# Altium PCB PCB1.PcbDoc
Units mm, origin at the board's own origin, x right, y up, seen from the top; angles counter-clockwise.
Board outline 88.57 x 89.64 mm, 2 copper layers (Top Layer, Bottom Layer); 16 components, 24 nets, 94 pads, 0 vias.
Unrouted connection lines stored in the file: 5.
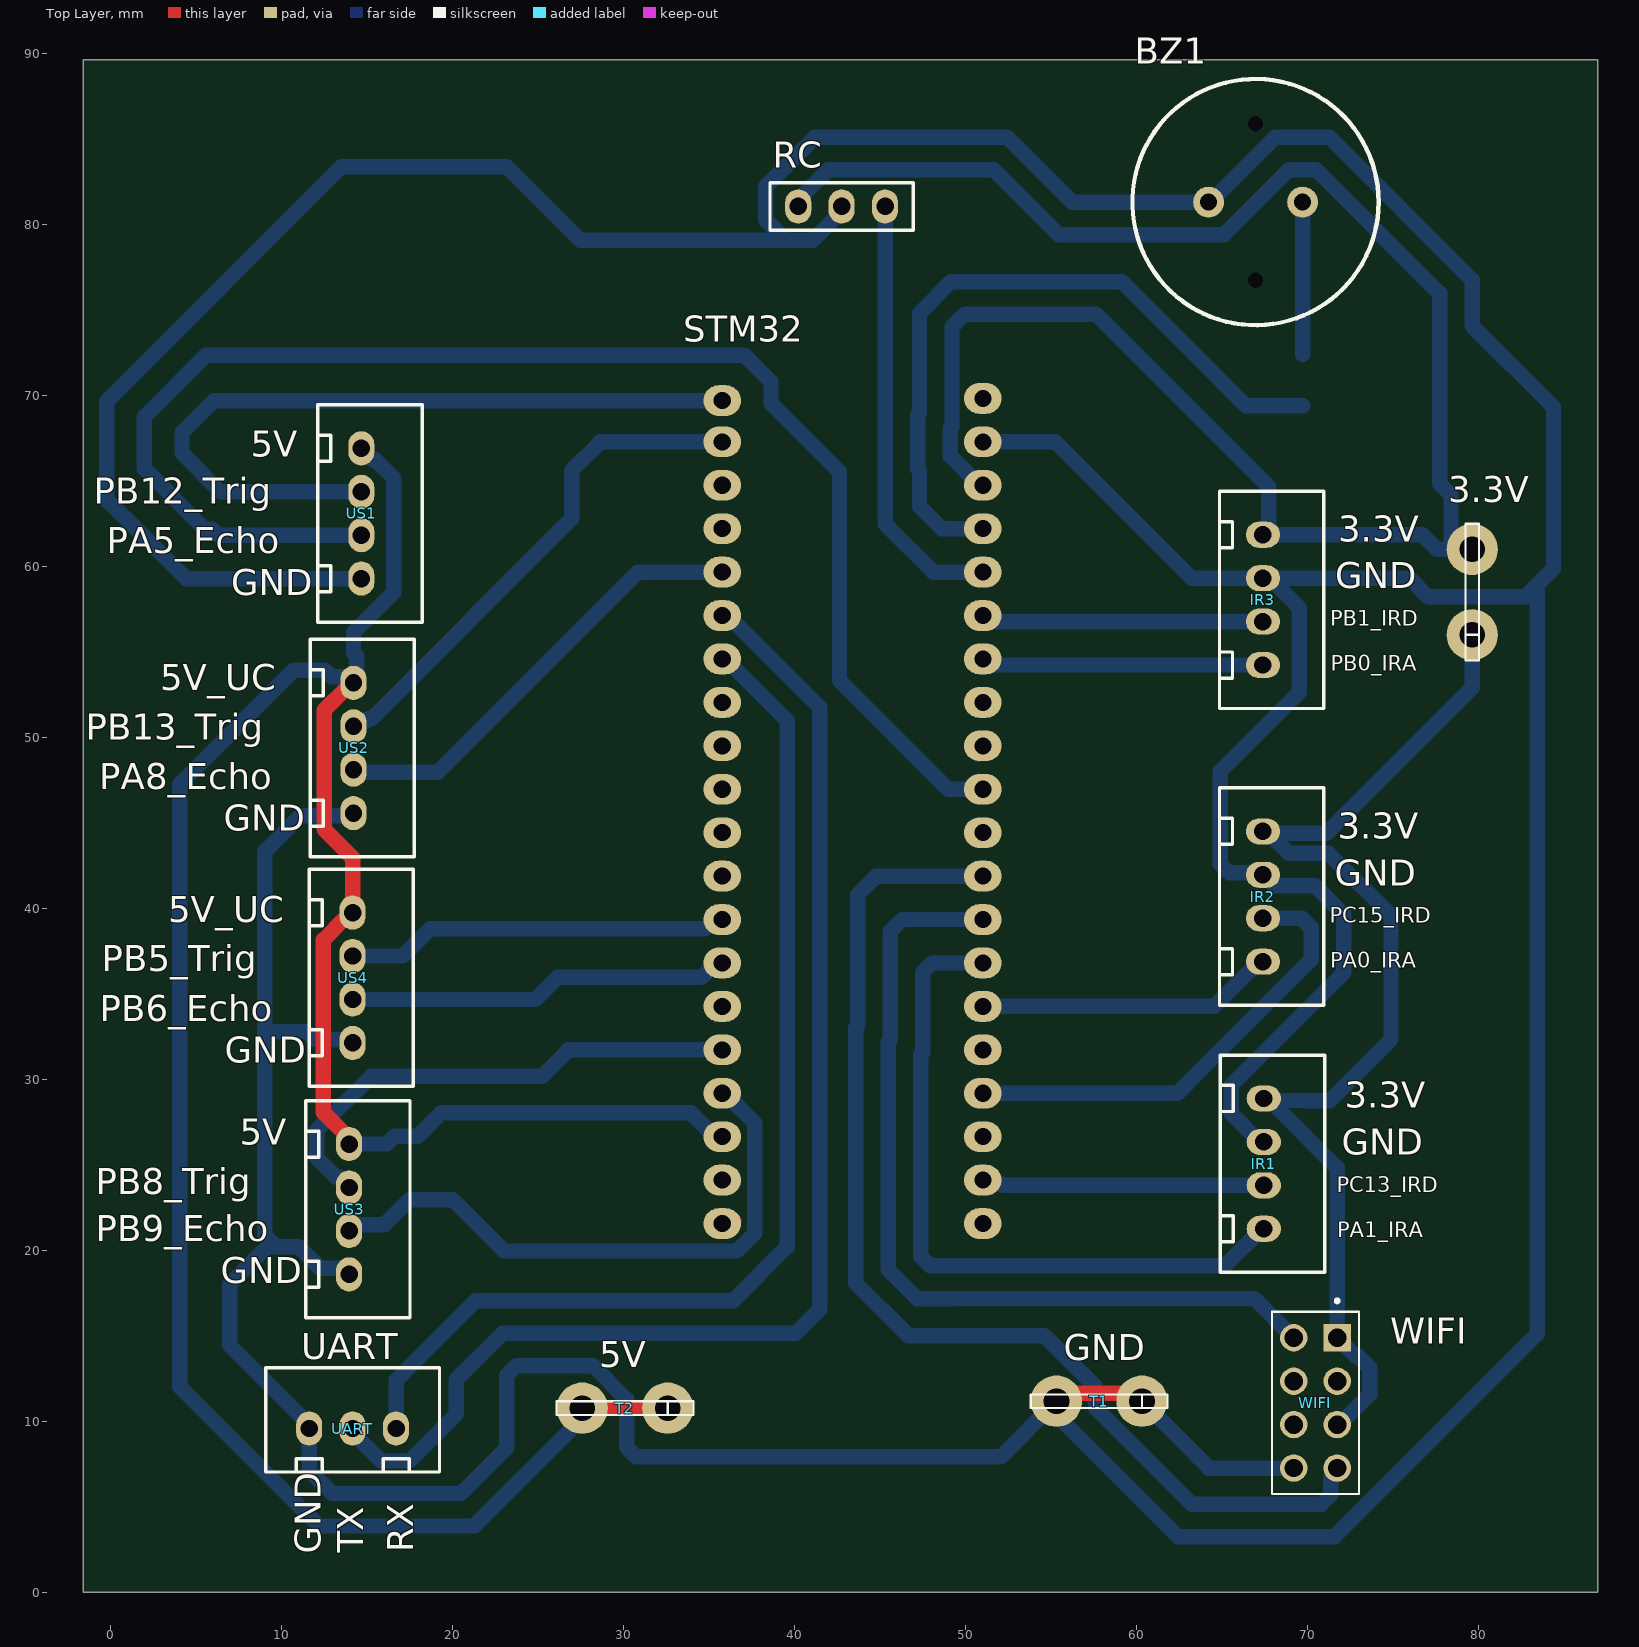
[diagram p0: Top Layer view]
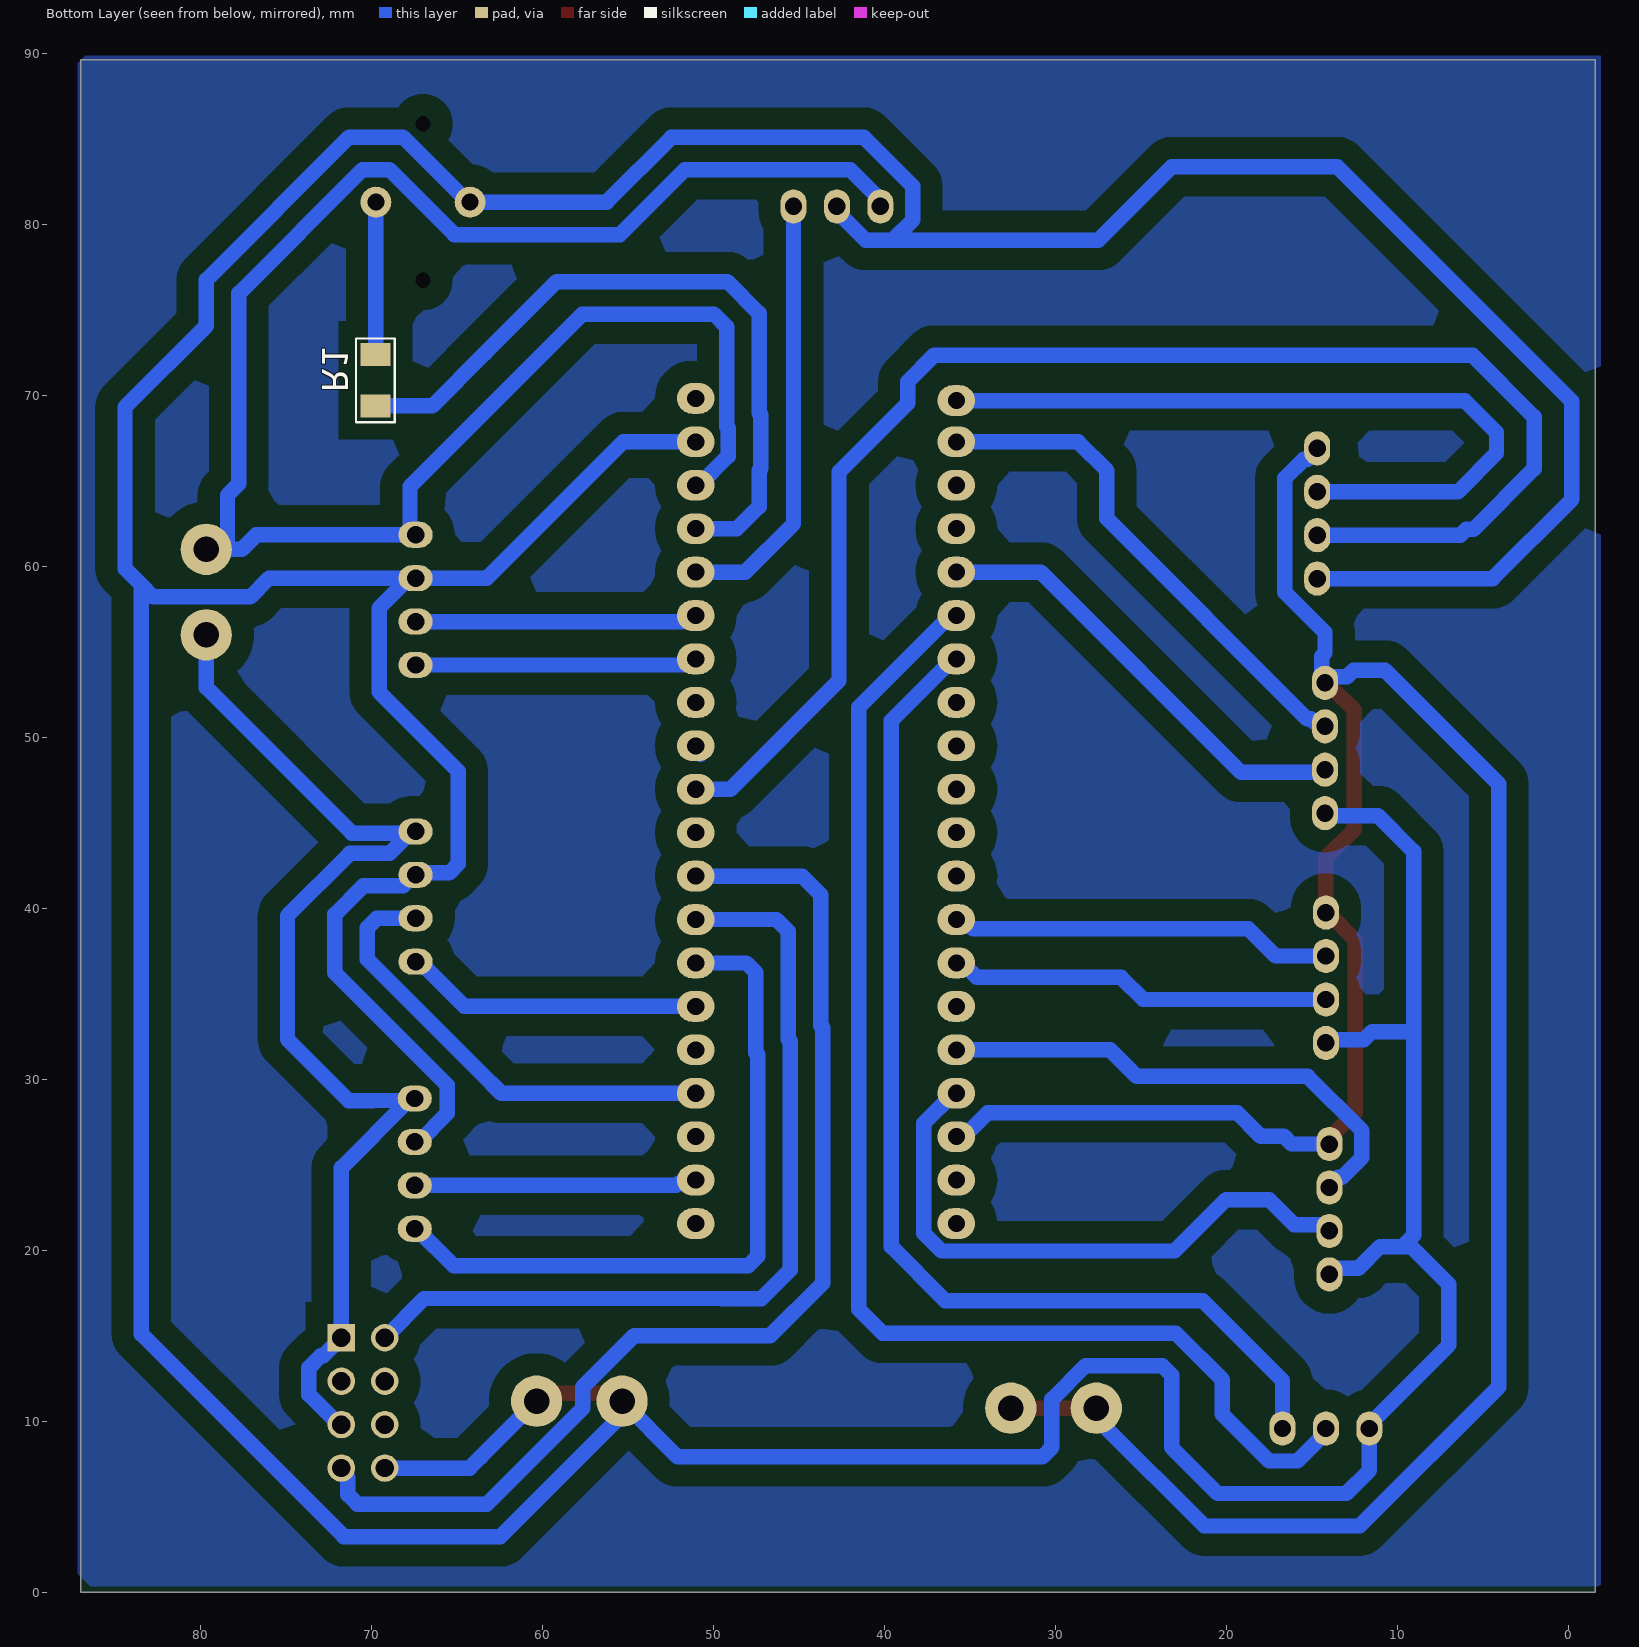
[diagram p1: Bottom Layer view, seen from below]
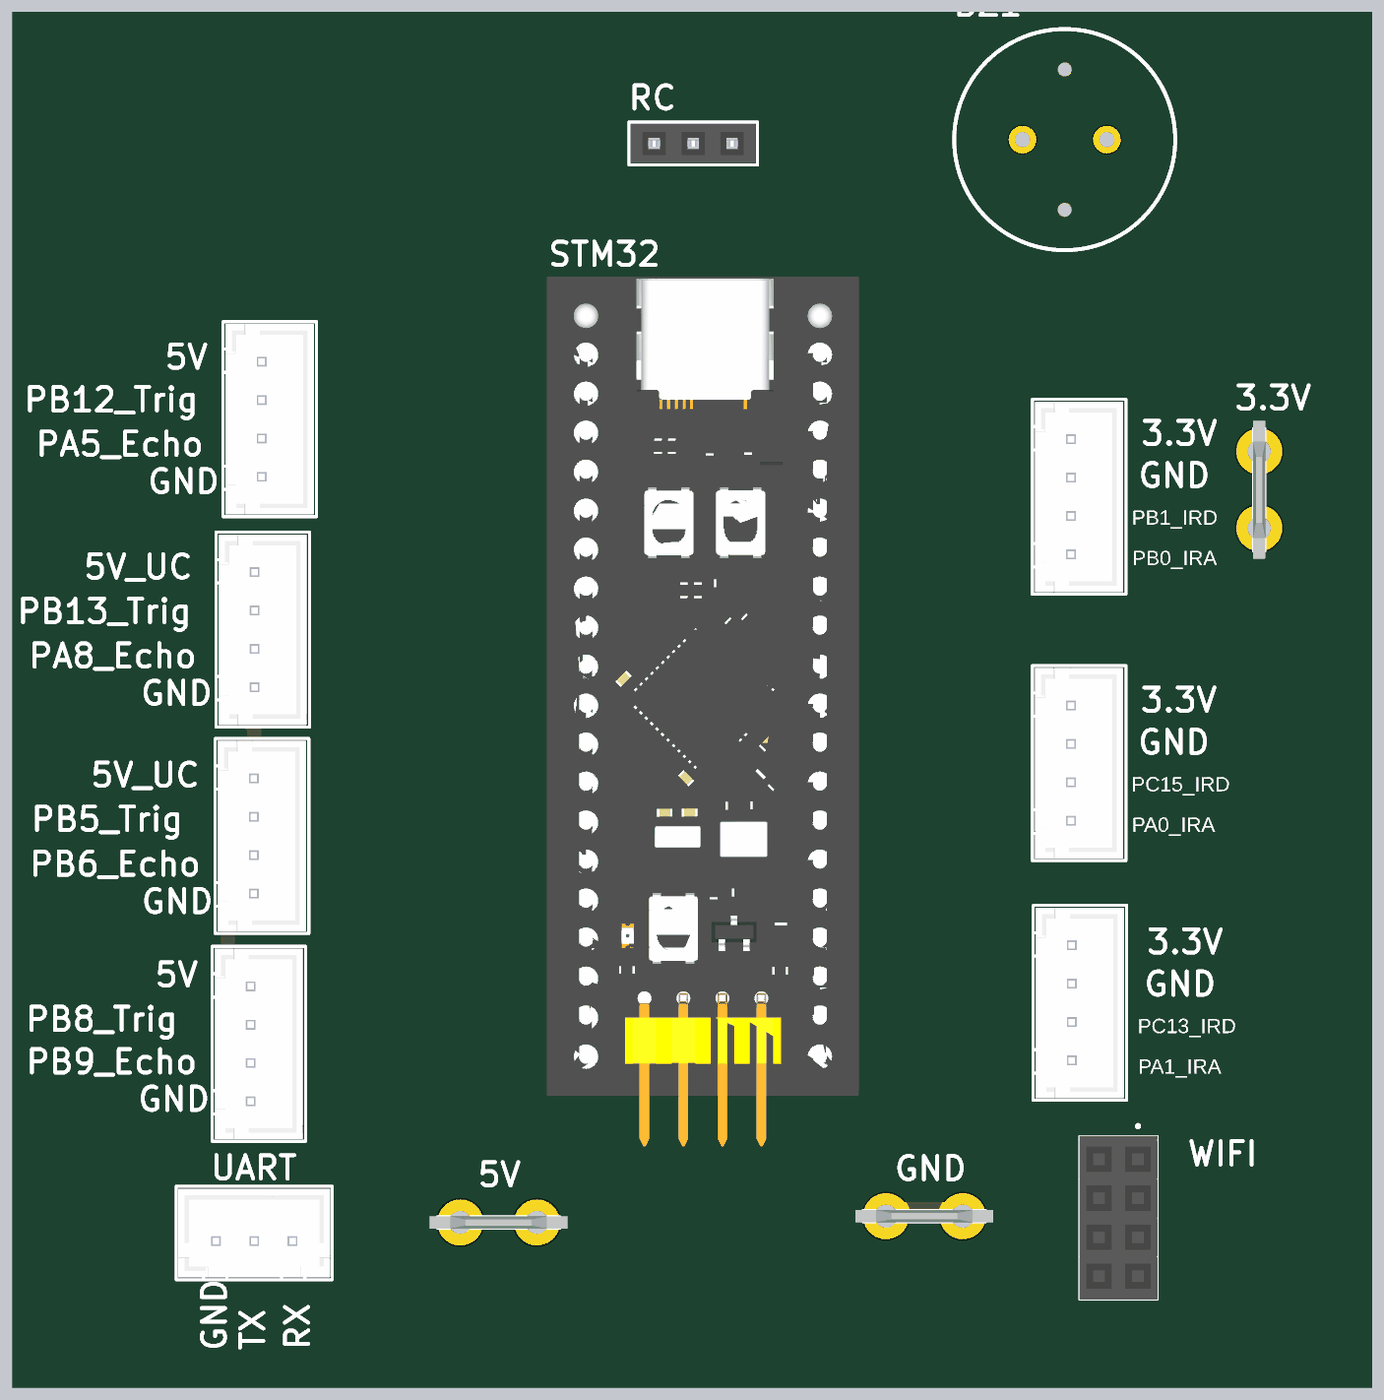
[diagram p2: 3D render of the assembled board from above, using the file's embedded part models]

## Layer stack, top to bottom
Top Solder: solder mask 0.0102, Solder Resist, Dk 3.5
Top Layer: signal copper 0.0356
Dielectric 1: dielectric 0.32, FR-4, Dk 4.8
Bottom Layer: signal copper 0.0356
Bottom Solder: solder mask 0.0102, Solder Resist, Dk 3.5

## Board outline
-1.575,0 87,0 87,89.635 -1.575,89.635

## Design rules (kind name [scope] priority, off if disabled: settings)
AssemblyTestPointUsage [All] p1: isadvanced=TRUE
AssemblyTestpoint [All] p1: isadvanced=TRUE testpointundercomponent=TRUE minsize=1.016 maxsize=2.54 preferedsize=1.524 minholesize=0 maxholesize=1.016 preferedholesize=0.813 testpointgrid=0.025 usegrid=TRUE gridtolerance=0 allowsidetop=TRUE allowsidebottom=TRUE
Clearance Clearance_2 [All] p1: isadvanced=TRUE gap=1.3 ignorepadtopadclearanceinfootprint=FALSE
Clearance PhysicalClearance_clearence [WithinRoom('clearence')] p2: gap=0.5 ignorepadtopadclearanceinfootprint=FALSE
Clearance Clearance_1_1 [OnMid vs OnMid] p3: gap=1 ignorepadtopadclearanceinfootprint=FALSE sourcerule=43 cellrowname=All cellrowtype=0 cellcolname=All cellcoltype=0 innerlayers=TRUE
Clearance Clearance_1_2 [(ExistsOnLayer('Top Layer') Or ExistsOnLayer('Bottom Layer')) vs (ExistsOnLayer('Top Layer') Or ExistsOnLayer('Bottom Layer'))] p4: gap=1 ignorepadtopadclearanceinfootprint=FALSE sourcerule=43 cellrowname=All cellrowtype=0 cellcolname=All cellcoltype=0 outerlayers=TRUE
Clearance Clearance_1 [All] p5: gap=1 ignorepadtopadclearanceinfootprint=FALSE ismatrix=TRUE
ComponentClearance [All] p1: isadvanced=TRUE gap=0.254 collisioncheckmode=3 verticalgap=0.254 showdistances=FALSE
FabricationTestPointUsage [All] p1: isadvanced=TRUE valid=0 allowmultiple=FALSE
FabricationTestpoint [All] p1: isadvanced=TRUE side=3 testpointundercomponent=TRUE minsize=1.016 maxsize=2.54 preferedsize=1.524 minholesize=0 maxholesize=1.016 preferedholesize=0.813 testpointgrid=0.025 allowsidetop=TRUE allowsidebottom=TRUE usegrid=TRUE gridtolerance=0
FanoutControl Fanout_BGA [IsBGA] p1: isadvanced=TRUE bgadir=Out bgaviamode=Centered fanoutstyle=Auto fanoutdirection=Alternating viagrid=0.025 // Fanout_BGA (Default Rule)
FanoutControl Fanout_LCC [IsLCC] p2: isadvanced=TRUE bgadir=Out bgaviamode=Centered fanoutstyle=Auto fanoutdirection=Alternating viagrid=0.025 // Fanout_LCC (Default Rule)
FanoutControl Fanout_SOIC [IsSOIC] p3: isadvanced=TRUE bgadir=Out bgaviamode=Centered fanoutstyle=Auto fanoutdirection=Alternating viagrid=0.025 // Fanout_SOIC (Default Rule)
FanoutControl Fanout_Small [(CompPinCount < 5)] p4: isadvanced=TRUE bgadir=Out bgaviamode=Centered fanoutstyle=Auto fanoutdirection=OutThenIn viagrid=0.025 // Fanout_Small (Default Rule)
FanoutControl Fanout_Default [All] p5: isadvanced=TRUE bgadir=Out bgaviamode=Centered fanoutstyle=Auto fanoutdirection=Alternating viagrid=0.025 // Fanout_Default (Default Rule)
Height [All] p1: isadvanced=TRUE minheight=0 maxheight=25.4 prefheight=12.7
HoleSize [All] p1: isadvanced=TRUE absolutevalues=TRUE maxlimit=2.54 minlimit=0.025 maxpercent=80.000 minpercent=20.000
HoleToHoleClearance [All] p1: isadvanced=TRUE gap=0.254 allowstackedmicrovias=TRUE
LayerPairs [All] p1: isadvanced=TRUE enforce=TRUE
MinimumSolderMaskSliver [All] p1: isadvanced=TRUE minsoldermaskwidth=0.254
NetAntennae [All] p1: isadvanced=TRUE netantennaetolerance=0
PasteMaskExpansion [All] p1: isadvanced=TRUE expansion=0
PlaneClearance [All] p1: isadvanced=TRUE clearance=0.508
PlaneConnect [All] p1: isadvanced=TRUE planeconnectstyle=Relief reliefexpansion=0.508 reliefentries=4 reliefconductorwidth=0.254 reliefairgap=0.254
PolygonConnect [All] p1: connectstyle=Relief reliefconductorwidth=0.254 reliefentries=4 polygonreliefangle="90 Angle" airgapwidth=0.254
RoutingCorners [All] p1: isadvanced=TRUE cornerstyle=45-Degree minsetback=2.54 maxsetback=2.54
RoutingPriority [All] p1: isadvanced=TRUE routingpriority=0
RoutingVias [All] p1: holewidth=0.711 width=1.27 viastyle="Through Hole" minholewidth=0.711 minwidth=1.27 maxholewidth=0.711 maxwidth=1.27
ShortCircuit [All] p1: isadvanced=TRUE allowed=FALSE
SilkToSilkClearance [All] p1: isadvanced=TRUE silktosilkclearance=0.254
SilkToSolderMaskClearance [IsPad] p1: isadvanced=TRUE minsilkscreentomaskgap=0.254 clearancetoexposedcopper=TRUE
SolderMaskExpansion [All] p1: isadvanced=TRUE expansion=0.102 istentingtop=FALSE
SupplyNets "Schematic Supply Nets_3" [InNet('+5V')] p1: isadvanced=TRUE voltage=0.000
SupplyNets "Schematic Supply Nets_2" [InNet('GND')] p2: isadvanced=TRUE voltage=0.000
SupplyNets "Schematic Supply Nets_1" [InNet('+3V3')] p3: isadvanced=TRUE voltage=0.000
SupplyNets "Schematic Supply Nets" [InNet('+5')] p4: isadvanced=TRUE voltage=0.000
UnRoutedNet [All] p1: isadvanced=TRUE
UnpouredPolygon [All] p1: isadvanced=TRUE
Width MaxMinWidth_1 [All] p1: isadvanced=TRUE maxlimit=1 minlimit=0.9 preferedwidth=0.95 minimp=50.000000 maximp=50.000000 favimp=50.000000
Width [All] p2 off: maxlimit=0.254 minlimit=0.254 preferedwidth=0.254
4 further rules are at their usual default settings.

## Components (designator, comment, footprint, x,y, rotation, side; value= is the part's Value field where it differs from the comment)
3.3V "Terminal pin 6.3mm" "Terminal pin 6.3mm" 79.654,58.496 r90 top (schematic designator T?)
BZ1 "PS1440P02BT" BUZZ_PS1440P02BT_TH 69.73,81.305 r180 top
IR1 "Line Follower2" DATA_PIN_HEADER_4_2.54m#1 67.462,25.07 r270 top
IR2 "Line Follower1" DATA_PIN_HEADER_4_2.54m#1 67.412,40.691 r270 top
IR3 "Line Follower3" DATA_PIN_HEADER_4_2.54m#1 67.412,58.039 r270 top
R1 "100R" RES_1206 69.748,70.891 r270 bottom
RC "IR" Female_Header_3 42.774,81.051 r0 top
STM32 "Stm32F401 small" STM32F401CCU6 43.028,47.092 r0 top (schematic designator STM1)
T1 "Terminal pin 6.3mm" "Terminal pin 6.3mm" 57.836,11.176 r180 top
T2 "Terminal pin 6.3mm" "Terminal pin 6.3mm" 30.099,10.77 r180 top
UART "DATA_PIN_HEADER_3_2.54m" DATA_PIN_HEADER_3_2.54m 14.173,9.576 r0 top
US1 "Ultrasonic1" DATA_PIN_HEADER_4_2.54m#2 14.681,63.094 r270 top
US2 "Ultrasonic2" DATA_PIN_HEADER_4_2.54m#2 14.224,49.378 r270 top
US3 "Ultrasonic3" DATA_PIN_HEADER_4_2.54m#2 13.97,22.403 r270 top
US4 "Ultrasonic4" DATA_PIN_HEADER_4_2.54m#2 14.173,35.941 r270 top
WIFI "WIFI" SULLINS_PPPC042LFBN-RC 70.485,11.074 r90 top

## Footprints (in the part's own frame and the unit in brackets; to place one, negate y for a bottom-side part, rotate by r counter-clockwise, add the part's x,y. Pads: shape width x height; smd on the part's side, far side on the other; paste and mask are expansions set on the pad)
BUZZ_PS1440P02BT_TH [mm] "AUDIO PIEZO TRANSDUCER 30V TH"
  round 1.8 hole 1 mask+0.076: 1(0,0) 2(5.5,0)
  round 0 hole 0.9: ""(2.75,4.572) ""(2.75,-4.572)
  silkscreen extent -4.45,-7.2 9.95,7.2, body extent -4.45,-7.2 9.95,7.2, height 9.55
DATA_PIN_HEADER_3_2.54m [mil]
  oval 60x78.74 hole 40: 1(-100,0) 2(0,0) 3(100,0)
  silkscreen extent -200,-100 200,140, body extent -195,-94 195,133, height 276
DATA_PIN_HEADER_4_2.54m#1 [mil]
  oval 60x78.74 hole 40: 1(-150,0) 2(-50,0) 3(50,0) 4(150,0)
  silkscreen extent -250,-100 250,140, body extent -244,-94 244,133, height 276
DATA_PIN_HEADER_4_2.54m#2 [mil]
  oval 78.74x60 hole 40: 1(-150,0) 2(-50,0) 3(50,0) 4(150,0)
  silkscreen extent -250,-100 250,140, body extent -244,-94 244,133, height 276
Female_Header_3 [mil]
  oval 60x78.74 hole 40: 1(-100,0) 2(0,0) 3(100,0)
  silkscreen extent -165,-55 165,55, body extent -160,-50 160,50, height 336
RES_1206 [mm] "CASE: 1206"
  rect 1.35x1.75 smd: 1(1.5,0) 2(-1.5,0)
  silkscreen extent -2.44,-1.15 2.46,1.11, body extent -1.55,-0.77 1.55,0.78, height 0.55
STM32F401CCU6 [mm]
  oval 2.2x1.8 hole 1: 3V3(-7.239,-25.527) 3V3(8.001,17.653) 5V(-7.239,-20.447) 5V(8.001,22.733) GND(-7.239,-22.987) GND(8.001,20.193) PA0(8.001,-12.827) PA1(8.001,-10.287) PA2(8.001,-7.747) PA3(8.001,-5.207) PA4(8.001,-2.667) PA5(8.001,-0.127) PA6(8.001,2.413) PA7(8.001,4.953) PA8(-7.239,12.573) PA9(-7.239,10.033) PA10(-7.239,7.493) PA11(-7.239,4.953) PA12(-7.239,2.413) PA15(-7.239,-0.127) PB0(8.001,7.493) PB1(8.001,10.033) PB2(8.001,12.573) PB3(-7.239,-2.667) PB4(-7.239,-5.207) PB5(-7.239,-7.747) PB6(-7.239,-10.287) PB7(-7.239,-12.827) PB8(-7.239,-15.367) PB9(-7.239,-17.907) PB10(8.001,15.113) PB12(-7.239,22.606) PB13(-7.239,20.193) PB14(-7.239,17.653) PB15(-7.239,15.113) PC13(8.001,-22.987) PC14(8.001,-20.447) PC15(8.001,-17.907) RESET(8.001,-15.367) VBAT(8.001,-25.527)
  body extent -9.78,-31.37 10.54,25.27, height 13.16
SULLINS_PPPC042LFBN-RC [mm]
  rect 1.605x1.605 / inner round 1.605 / far side rect 1.605x1.605 hole 1.07: 1(3.81,-1.27)
  round 1.605 hole 1.07: 2(3.81,1.27) 3(1.27,-1.27) 4(1.27,1.27) 5(-1.27,-1.27) 6(-1.27,1.27) 7(-3.81,-1.27) 8(-3.81,1.27)
  silkscreen extent -5.33,-2.54 6.07,2.54, body extent -5.33,-2.54 5.33,2.54, height 8.51
"Terminal pin 6.3mm" [mm]
  round 3 hole 1.5: 1(-2.5,0) 2(2.5,0)
  silkscreen extent -4,-0.4 4,0.4, body extent -4.5,-0.4 4.5,0.4, height 10

## Part data
BZ1: library part BUZZ_PS1440P02BT-30V-TH, "Buzzers Transducer, Externally Driven Piezo 3V  4kHz 75dB @ 3V, 10cm Through Hole PC Pins", Alternate Part Number-1=NA, Case/Package=TH, Manufacturer="TDK Corporation", Manufacturer Part Number=PS1440P02BT, Supplier Part Number-1=NA, Supplier-1="SP ROAD"
IR1 IR2 IR3 US1 US2 US3 US4: library part DATA_PIN_HEADER_4_2.54m
R1: library part RES_10R-0.25W-5%-1206, "10 Ohms ±5% 0.25W, 1/4W Chip Resistor 1206 (3216 Metric) Automotive AEC-Q200 Thick Film", Alternate Part Number-1=NA, Case/Package=1206, Manufacturer=Yageo, Manufacturer Part Number=RMCF1206JT10R0, Supplier Part Number-1=WR12X10R0FTL, Supplier-1=SIRICOM
RC: library part FEMALE_HEADER_3
WIFI: library part PPPC042LFBN-RC, "8 Position Total Dual Row 2.54 mm Pitch Straight Female Header", Package=None, Check_prices=https://www.snapeda.com/parts/PPPC042LFBNRC/Sullins/view-part/?ref=eda, MF="Sullins Connector Solutions", MP=PPPC042LFBNRC, SnapEDA_Link=https://www.snapeda.com/parts/PPPC042LFBNRC/Sullins/view-part/?ref=snap

## Nets (pads, with @x,y where several pads share a name; then routed paths per layer and width w, separated by ;. In a path a pad name is that pad's centre, name@x,y a point inside that pad or via, vN(x,y) a via of type N, cw(c..) or ccw(c..) an arc to the next point about the centre after c; other vN are vias at no path point)
+3V3: 3.3V.1 3.3V.2 IR1.1 IR2.1 IR3.1 RC.1 STM32.3V3 WIFI.1 WIFI.5 | length 176.6
  Top Layer w0.9: STM32.3V3@35.789,21.565 35.961,21.737 STM32.3V3@36.455,21.737
  Bottom Layer w0.9: RC.1@40.31,80.975 RC.1 40.234,81.436 41.987,83.189 51.673,83.189 55.457,79.405 65.143,79.405 68.943,83.205 70.517,83.205 77.749,75.973 77.749,64.834 78.414,64.169 78.414,61.536 78.547,61.536 78.816,61.266 3.3V.2@78.816,60.996 ; STM32.3V3@51.029,64.745 50.829,64.745 49.129,66.445 49.129,68.072 49.225,68.168 49.225,74.015 49.962,74.752 57.658,74.752 67.742,64.668 67.742,62.137 IR3.1@67.454,61.849 ; IR2.1 67.65,44.501 IR2.1@67.751,44.399 ; IR3.1 IR3.1@67.454,61.849 ; IR1.1 67.7,28.88 IR1.1@67.82,28.76 ; 71.62,12.479 71.755,12.344 ; WIFI.5 71.902,9.804 73.655,11.557 73.655,13.131 72.949,13.837 72.802,13.837 WIFI.1 71.755,24.825 IR1.1@67.82,28.76 ; 3.3V.1 79.654,52.908 71.145,44.399 IR2.1@67.751,44.399 ; 3.3V.2 3.3V.2@78.816,60.996 ; IR3.1@67.454,61.849 76.728,61.849 77.581,60.996 3.3V.2@78.816,60.996 ; IR2.1@67.751,44.399 68.93,43.221 71.253,43.221 74.905,39.57 74.905,32.334 71.323,28.753 69.896,28.753 69.889,28.76 IR1.1@67.82,28.76
+5: STM32.5V T2.1 T2.2 US1.1 US2.1 US3.1 US4.1 | length 152.1
  Top Layer w0.9: US3.1 13.97,26.561 12.461,28.07 12.461,38.158 13.697,39.394 13.885,39.394 14.173,39.682 14.173,42.959 12.512,44.62 12.512,51.595 13.747,52.83 13.936,52.83 14.224,53.118 US2.1 ; T2.2 T2.1 ; STM32.5V@35.789,26.645 STM32.5V@35.989,26.645 ; STM32.5V@50.829,69.825 STM32.5V@51.029,69.825
  Bottom Layer w0.9: US3.1 13.977,26.22 16.182,26.22 16.632,26.67 17.984,26.67 19.36,28.046 33.944,28.046 35.345,26.645 STM32.5V@35.789,26.645 ; US2.1 14.224,53.257 13.936,53.545 12.936,53.545 12.557,53.924 10.719,53.924 4.064,47.269 4.064,12.008 12.196,3.876 21.286,3.876 27.197,9.787 27.197,10.368 T2.2 ; US2.1@14.409,53.924 14.409,54.75 14.224,54.935 14.224,56.139 16.581,58.497 16.581,65.151 15.468,66.264 15.252,66.264 14.681,66.834 US1.1
Buzzer: R1.1 STM32.PB10 | length 41.8
  Bottom Layer w0.9: STM32.PB10 48.616,62.205 47.325,63.496 47.325,65.615 47.229,65.711 47.229,68.859 47.325,68.955 47.325,74.802 49.175,76.652 59.162,76.652 63.348,72.466 66.422,69.391 R1.1
GND: BZ1.2 IR1.2 IR2.2 IR3.2 RC.2 STM32.GND T1.1 T1.2 UART.1 US1.4 US2.4 US3.4 US4.4 WIFI.8 | length 436.4
  Top Layer w0.9: STM32.GND@35.789,24.105 STM32.GND@36.136,24.105 ; STM32.GND@50.976,67.285 STM32.GND@51.029,67.285 ; T1.2@55.336,11.633 T1.1@60.336,11.633
  Bottom Layer w0.9: 9.068,32.791 11.473,32.791 11.961,32.304 14.001,32.304 US4.4 ; US3.4 13.97,18.662 13.682,18.95 12.279,18.95 11.011,20.218 9.703,20.218 ; US2.4 14.072,45.415 11.125,45.415 9.042,43.332 9.042,20.879 9.703,20.218 ; US1.4 4.425,59.284 -0.208,63.917 -0.208,69.656 13.499,83.363 23.19,83.363 27.478,79.075 39.523,79.075 ; RC.2 42.774,80.752 41.097,79.075 39.523,79.075 ; STM32.GND@51.029,67.285 55.27,67.285 63.246,59.309 IR3.2 IR3.2@67.787,59.309 ; T1.1 63.607,7.904 64.247,7.264 WIFI.8 ; IR1.2 67.224,26.34 65.562,28.002 65.562,29.667 66.675,30.78 66.685,30.78 72.136,36.231 72.136,39.651 70.466,41.321 68.143,41.321 67.503,41.961 IR2.2 67.292,42.08 65.436,42.08 64.922,42.593 64.922,48.034 69.54,52.652 69.54,57.556 IR3.2@67.787,59.309 ; 83.45,56.171 83.45,56.603 ; 9.703,20.218 9.195,20.218 6.984,18.008 6.984,14.463 11.633,9.814 11.633,7.126 12.983,5.776 20.499,5.776 23.19,8.467 23.19,12.702 23.747,13.259 28.227,13.259 30.201,11.285 30.201,8.481 30.757,7.925 52.085,7.925 T1.2 55.738,10.774 55.738,9.97 62.452,3.256 71.605,3.256 83.45,15.101 83.45,56.603 ; 39.523,79.075 38.334,80.264 38.334,82.223 41.2,85.089 52.46,85.089 56.244,81.305 BZ1.2 64.356,81.305 68.156,85.105 71.304,85.105 79.649,76.76 79.649,74.073 84.407,69.315 84.407,59.866 83.45,58.908 ; IR3.2@67.787,59.309 75.985,59.309 77.078,58.217 82.758,58.217 83.45,58.908 ; 83.45,56.603 83.45,58.908
IR1_A0: IR2.4 STM32.PA0 | length 17.5
  Bottom Layer w0.9: STM32.PA0 64.557,34.265 67.174,36.881 IR2.4
IR1_D0: IR2.3 STM32.PC15 | length 27.4
  Bottom Layer w0.9: STM32.PC15 62.402,29.185 63.662,30.445 63.662,30.454 65.888,32.68 65.898,32.68 70.236,37.018 70.236,38.864 69.679,39.421 IR2.3
IR2_A0: IR1.4 STM32.PA1 | length 41.6
  Bottom Layer w0.9: STM32.PA1 48.065,36.805 47.508,36.248 47.508,31.548 47.396,31.436 47.396,19.657 47.953,19.101 65.187,19.101 67.346,21.26 IR1.4
IR2_D0: IR1.3 STM32.PC13 | length 16.6
  Bottom Layer w0.9: STM32.PC13 51.201,23.932 52.037,23.932 52.17,23.8 IR1.3
IR3_A0: IR3.4 STM32.PB0 | length 16.8
  Bottom Layer w0.9: STM32.PB0 51.472,54.585 51.828,54.229 IR3.4 IR3.4@67.64,54.229
IR3_D0: IR3.3 STM32.PB1 | length 16.8
  Bottom Layer w0.9: STM32.PB1 51.472,57.125 51.828,56.769 IR3.3 IR3.3@67.64,56.769
IR_OUT: RC.3 STM32.PB2 | length 25.5
  Bottom Layer w0.9: RC.3 45.314,62.484 48.133,59.665 STM32.PB2
NetBZ1_1: BZ1.1 R1.2 | length 8.9
  Bottom Layer w0.9: BZ1.1 69.739,81.296 69.739,72.401 R1.2
RX: STM32.PA10 UART.3 | length 65
  Bottom Layer w0.9: UART.3 16.713,12.395 21.377,17.059 36.438,17.059 39.589,20.209 39.589,50.985 35.989,54.585 STM32.PA10
TX: STM32.PA9 UART.2 | length 76.2
  Bottom Layer w0.9: UART.2 14.377,9.372 14.377,9.134 15.835,7.676 17.5,7.676 20.23,10.406 20.23,12.429 22.96,15.159 40.105,15.159 41.489,16.542 41.489,51.772 36.136,57.125 STM32.PA9
US1_ECHO: STM32.PA5 US1.3 | length 86.3
  Bottom Layer w0.9: US1.3 6.304,61.824 5.964,62.164 5.54,62.164 1.992,65.711 1.992,68.744 5.595,72.348 37.086,72.348 38.639,70.795 38.639,69.535 42.646,65.527 42.646,53.315 48.997,46.965 STM32.PA5
US1_TRIG: STM32.PB12 US1.2 | length 45
  Bottom Layer w0.9: US1.2 6.451,64.364 4.192,66.623 4.192,67.833 6.056,69.698 STM32.PB12
US2_ECHO: STM32.PA8 US2.3 | length 26.5
  Bottom Layer w0.9: US2.3 14.376,47.955 14.529,47.955 19.14,47.955 30.85,59.665 STM32.PA8
US2_TRIG: STM32.PB13 US2.2 | length 30.2
  Bottom Layer w0.9: US2.2 14.307,50.564 14.529,50.564 15.05,51.085 15.266,51.085 26.98,62.799 26.98,65.599 28.666,67.285 STM32.PB13
US3_ECHO: STM32.PB9 US3.3 | length 35.3
  Bottom Layer w0.9: US3.3 13.97,21.202 14.258,21.49 16.02,21.49 17.496,22.966 20.014,22.966 23.019,19.961 36.653,19.961 37.593,20.9 37.689,20.996 37.689,27.432 35.936,29.185 STM32.PB9
US3_TRIG: STM32.PB8 US3.2 | length 29.9
  Bottom Layer w0.9: US3.2 13.97,23.742 13.449,24.263 13.233,24.263 12.07,25.426 12.07,27 15.245,30.175 25.236,30.175 26.786,31.725 STM32.PB8
US4_ECHO: STM32.PB6 US4.3 | length 22.5
  Bottom Layer w0.9: US4.3 24.854,34.671 26.15,35.966 34.582,35.966 35.421,36.805 STM32.PB6
US4_TRIG: STM32.PB5 US4.2 | length 22.5
  Bottom Layer w0.9: US4.2 17.111,37.211 18.699,38.799 34.8,38.799 35.345,39.345 STM32.PB5
WIFI_RXD: STM32.PA2 WIFI.2 | length 50.9
  Bottom Layer w0.9: STM32.PA2 50.976,39.345 46.302,39.345 45.608,38.651 45.608,32.335 45.496,32.223 45.496,18.87 47.201,17.165 49.464,17.165 49.479,17.18 66.546,17.18 66.919,17.18 WIFI.2
WIFI_TXD: STM32.PA3 WIFI.7 | length 66.3
  Bottom Layer w0.9: STM32.PA3 44.806,41.885 43.708,40.787 43.708,33.122 43.596,33.01 43.596,18.083 46.678,15.002 54.218,15.002 54.627,15.002 57.638,11.991 57.638,10.757 63.239,5.156 70.818,5.156 71.374,5.713 71.374,6.693 71.755,7.074 WIFI.7
pads on no net: BZ1. STM32.PA4 STM32.PA6 STM32.PA7 STM32.PA11 STM32.PA12 STM32.PA15 STM32.PB3 STM32.PB4 STM32.PB7 STM32.PB14 STM32.PB15 STM32.PC14 STM32.RESET STM32.VBAT WIFI.3 WIFI.4 WIFI.6
copper on no net: | length 1.4
  Bottom Layer w0.9: 35.442,64.745 35.789,64.745 ; 35.789,49.505 35.916,49.378 ; 50.775,48.997 50.775,49.251 51.029,49.505 50.856,49.677

## Polygon pours and split planes (outlines as drawn)
no net on Bottom Layer "NONET_L02_P002" (solid, pour order 2): 86.741,0.356 -1.727,0.356 -1.905,0.178 -1.905,89.865 86.741,89.865 87.173,89.433 87.173,0.787

## Silkscreen, mask and mechanical layers (free items; w line width, h text height)
Top Overlay:
  text "5V" at 8.204,66.421 h1.52
  text "PB12_Trig" at -0.965,63.652 h1.52
  text "3.3V" at 71.806,61.451 h1.52
  text "PA5_Echo" at -0.203,60.757 h1.52
  text "GND" at 71.628,58.708 h1.52
  text "GND" at 7.087,58.318 h1.52
  text "PB1_IRD" at 71.349,56.227 h1.52
  text "PB0_IRA" at 71.374,53.594 h1.52
  text "5V_UC" at 2.921,52.756 h1.52
  text "PB13_Trig" at -1.422,49.86 h1.52
  text "PA8_Echo" at -0.66,46.965 h1.52
  text "GND" at 6.629,44.526 h1.52
  text "3.3V" at 71.78,44.078 h1.52
  text "GND" at 71.603,41.335 h1.52
  text "5V_UC" at 3.378,39.192 h1.52
  text "PC15_IRD" at 71.323,38.853 h1.52
  text "PB5_Trig" at -0.508,36.322 h1.52
  text "PA0_IRA" at 71.349,36.22 h1.52
  text "PB6_Echo" at -0.61,33.401 h1.52
  text "GND" at 6.68,30.963 h1.52
  text "3.3V" at 72.187,28.33 h1.52
  text "5V" at 7.569,26.187 h1.52
  text "GND" at 72.009,25.587 h1.52
  text "PB8_Trig" at -0.864,23.292 h1.52
  text "PC13_IRD" at 71.73,23.105 h1.52
  text "PB9_Echo" at -0.838,20.523 h1.52
  text "PA1_IRA" at 71.755,20.472 h1.52
  text "GND" at 6.452,18.085 h1.52
  text "WIFI" at 74.854,14.529 h1.52
  text "UART" at 11.176,13.614 h1.52
  text "GND" at 55.753,13.564 h1.52
  text "5V" at 28.6,13.157 h1.52
  text "RX" at 17.704,2.337 h1.52 r90
  text "TX" at 14.783,2.311 h1.52 r90
  text "GND" at 12.294,2.261 h1.52 r90